# Altium PCB GPS_PCB.PcbDoc
Units mil, origin at the board's own origin, x right, y up, seen from the top; angles counter-clockwise.
Board outline 2795 x 1855 mil, 2 copper layers (Top Layer, Bottom Layer); 2 components, 6 nets, 31 pads, 0 vias.
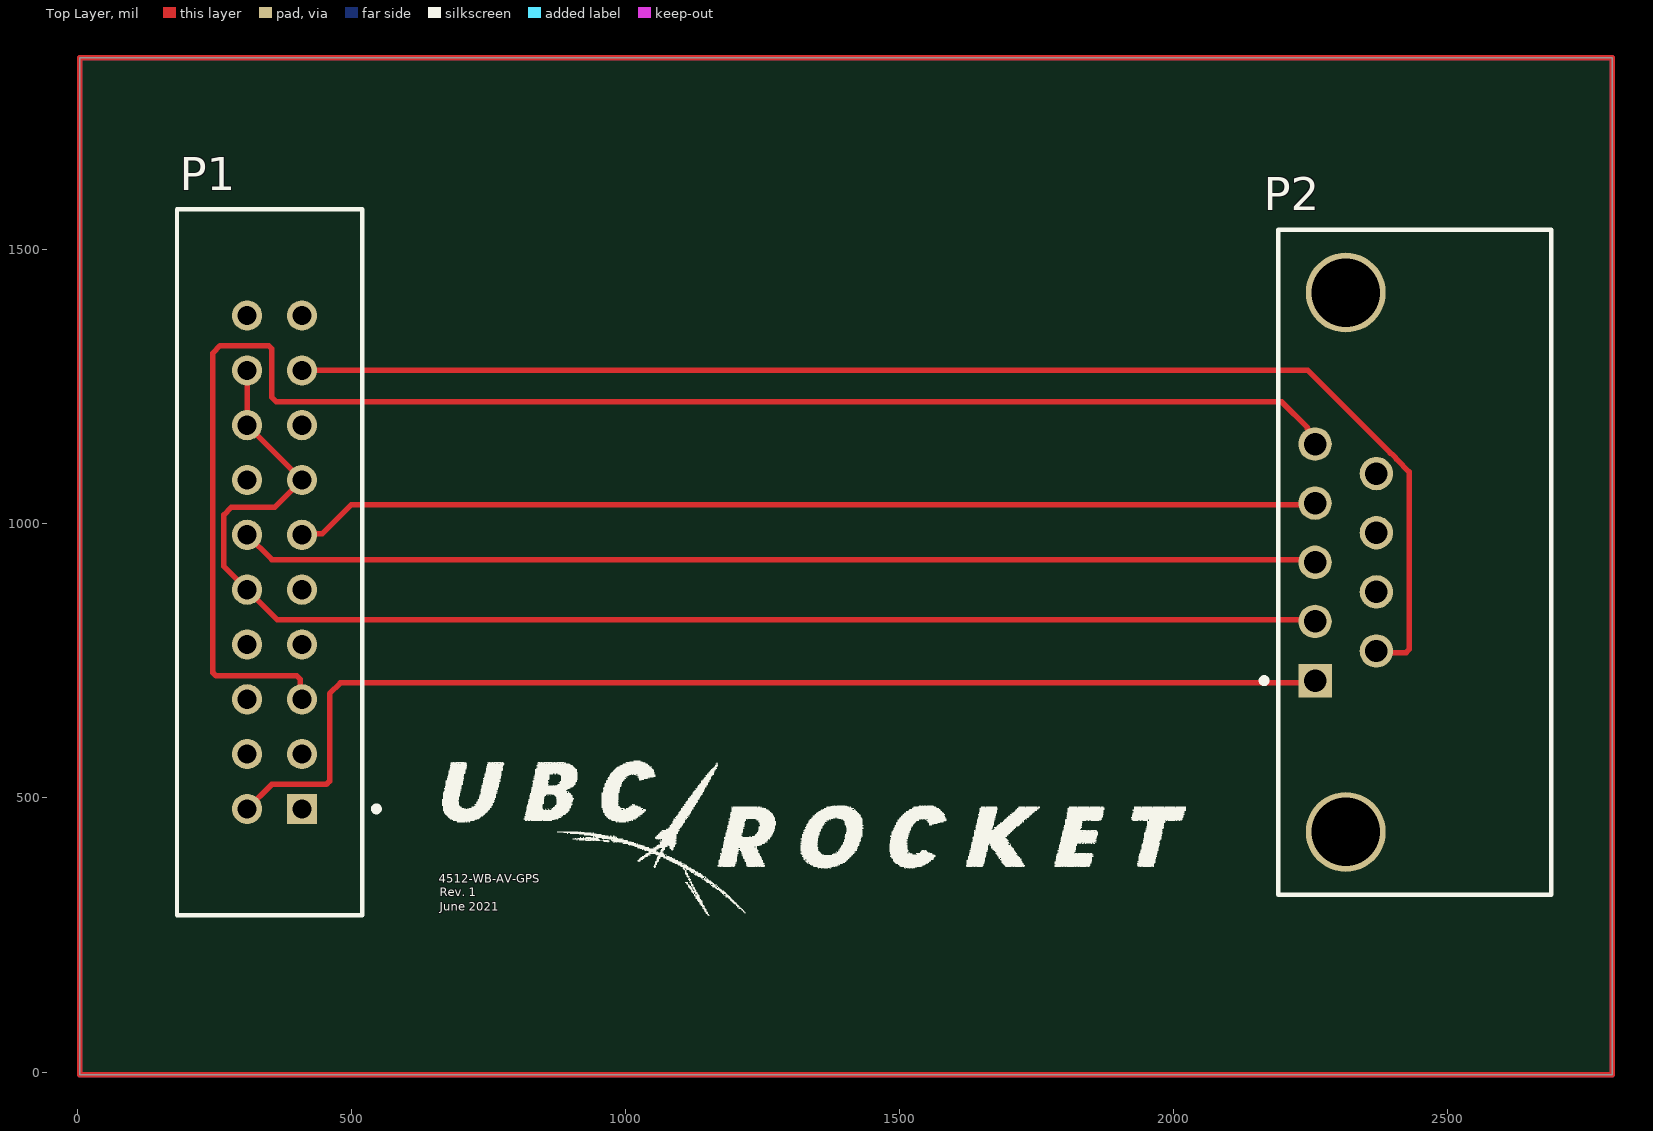
[diagram p0: Top Layer view]
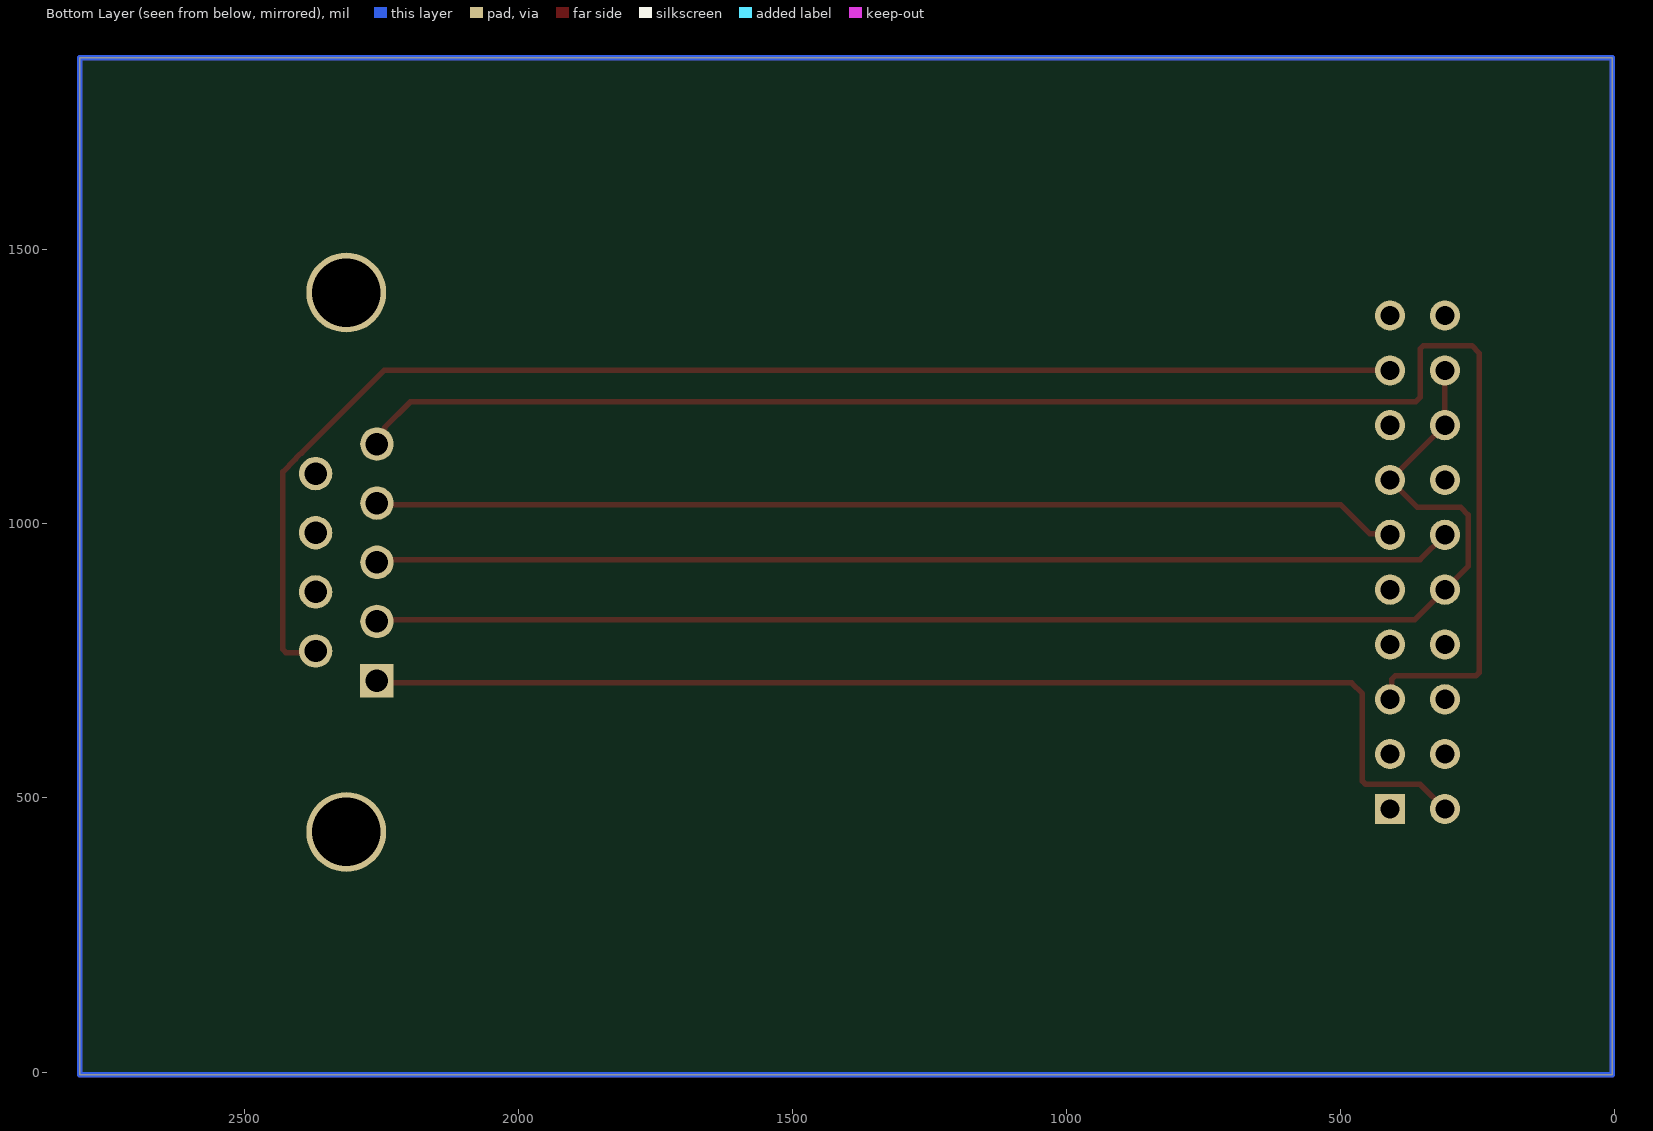
[diagram p1: Bottom Layer view, seen from below]

## Layer stack, top to bottom
Top Solder: solder mask 0.4, Solder Resist, Dk 3.5
Top Layer: signal copper 1.4
Dielectric 1: dielectric 12.6, FR-4, Dk 4.8
Bottom Layer: signal copper 1.4
Bottom Solder: solder mask 0.4, Solder Resist, Dk 3.5

## Board outline
5,-5 5,1850 2800,1850 2800,-5

## Design rules (kind name [scope] priority, off if disabled: settings)
Clearance [All] p1: gap=10 ignorepadtopadclearanceinfootprint=FALSE except(0: Arc-Hole Track-Hole SMDPad-Hole THPad-Hole Via-Hole Fill-Hole Poly-Hole Region-Hole Text-Hole)
PolygonConnect [All] p1: connectstyle=Relief reliefconductorwidth=10 reliefentries=4 polygonreliefangle="90 Angle" airgapwidth=10
RoomDefinition "20 Pin Header" [InComponentClass('20 Pin Header')] p1: confinementstyle=ConfineIn formatcopy=TRUE lockcomponents=FALSE outline 100,100 2750,100 2750,1750 100,1750
RoutingVias [All] p1: holewidth=28 width=50 viastyle="Through Hole" minholewidth=28 minwidth=50 maxholewidth=28 maxwidth=50
SolderMaskExpansion [All] p1: expansion=4 istentingtop=FALSE
Width [All] p1: maxlimit=10 minlimit=10 preferedwidth=10
30 further rules are at their usual default settings.

## Components (designator, comment, footprint, x,y, rotation, side; value= is the part's Value field where it differs from the comment)
P1 "N2520-6002RB" 3M-N2520-6002RB_V 360,930 r90 top
P2 "5747840-4" TECO-5747840-4_V 2314.09,929.92 r90 top

## Footprints (in the part's own frame and the unit in brackets; to place one, negate y for a bottom-side part, rotate by r counter-clockwise, add the part's x,y. Pads: shape width x height; smd on the part's side, far side on the other; paste and mask are expansions set on the pad)
3M-N2520-6002RB_V [mm] "CONN, 20-Leads, Body 32.72x8.59mm, Picth 2.54mm"
  rect 1.4x1.4 hole 0.89: 1(-11.43,-1.27)
  round 1.4 hole 0.89: 2(-11.43,1.27) 3(-8.89,-1.27) 4(-8.89,1.27) 5(-6.35,-1.27) 6(-6.35,1.27) 7(-3.81,-1.27) 8(-3.81,1.27) 9(-1.27,-1.27) 10(-1.27,1.27) 11(1.27,-1.27) 12(1.27,1.27) 13(3.81,-1.27) 14(3.81,1.27) 15(6.35,-1.27) 16(6.35,1.27) 17(8.89,-1.27) 18(8.89,1.27) 19(11.43,-1.27) 20(11.43,1.27)
  silkscreen extent -16.36,-4.85 16.36,4.52, body extent -16.36,-4.07 16.36,4.52, height 9.91
TECO-5747840-4_V [mm] "THD, 9-Leads, Body 30.81x18.62mm, Pitch 1.37mm"
  rect 1.55x1.55 hole 1.04: 1(-5.48,1.42)
  round 1.55 hole 1.04: 2(-2.74,1.42) 3(0,1.42) 4(2.74,1.42) 5(5.48,1.42) 6(-4.11,-1.42) 7(-1.37,-1.42) 8(1.37,-1.42) 9(4.11,-1.42)
  round 3.7 hole 3.17: MH1(-12.495,0) MH2(12.495,0)
  silkscreen extent -15.41,-9.52 15.41,3.9, body extent -15.52,-15.42 15.52,3.19, height 12.27

## Part data
P1: library part CMP-2000-06796-2, "Male Header, Pitch 2.54 mm, 2 x 10 Position, Height 9.91 mm, Tail Length 2.84 mm, -55 to 105 degC, RoHS", Manufacturer=3MInterconnectSolutions, Package Description="Male Header, Pitch 2.54 mm, 2 x 10 Position, Height 9.91 mm, Tail Length 2.84 mm", Category=ConnectorHeadersandPCBReceptacles, Contact Plating=GoldOverNickel, Datasheet URL=https://datasheet.ciiva.com/11750/0900766b807b18da-11750722.pdf, Datasheet Version=05/2007, Gender=HDR, Manufacturer URL=http://www.3m.com/, Mounting Technology=ThroughHole, Number of Contacts=20, Number of Rows=2, Package Reference=N2520-6002RB, Pitch=2.54mm, Termination Method=Solder, Type=ShroudedHeader
P2: library part CMP-2000-05648-1, "Male D-Sub Connector, Pitch 1.37 mm, 9 Position, Height 12.93 mm, Tail Length 3.55 mm, -55 to 105 degC, RoHS, Tray", Color=Black, Current Rating=6A, Manufacturer="TE Connectivity", Operating Temperature=-55°C~105°C, Package Description="9-Pin Through Hole Device, Body 30.81 x 18.62 mm, Pitch 1.37 mm", Standard Package=130, Voltage Rating=125V, 3D Model=5747840-4.pdf, Catalog Drawings=AMPD-SubMale.318, Category=Connectors,Interconnects, Connector Style=D-Sub, Connector Type=Plug,MalePins, Contact Finish=Gold, Contact Finish Thickness=Flash, Contact Type=Signal, Datasheet URL=http://www.te.com/commerce/DocumentDelivery/DDEController?Action=showdoc&DocId=Customer+Drawing%7F5747840%7FD%7Fpdf%7FEnglish%7FENG_CD_5747840_D.pdf%7F5747840-4, Datasheet Version="Rev. D, 01/2013", Dynamic Catalog=AMPLIMITEHD-20Series, Family=D-SubConnectors, Featured Product=AMPLIMITED-SubminiatureConnectors, Features=BoardLock,GroundStrap,GroundingIndents, Flange Feature=Housing/Shell(4-40), Manufacturer URL=http://www.te.com/, Mating Products="5-747905-7-ND / -CONND-SUBRCPT9POSVERTSLD / 5-787355-1-ND / -CONNRCPT9POSVERTSOLDERCUP / 5746861-4-ND / -CONNRECEPT9POSGOLDIDC / A32510-ND / -CONND-SUBRCPT9POSSLDCUPAU / AFL09B-ND / -CONND-SUBRECEPT9POS30GOLD / A31975-ND / -CONND-SUBRECEPT9P22-26AWGAU / A31974-ND / -CONND-SUBRECEPT9P20-22AWGAU / A31973-ND / -CONND-SUBRECEPT9P26-30AWGAU / A31931-ND / -CONND-SUBRCPT9POS22-26AWGAU", Mounting Technology=ThroughHole, Mounting Type=ThroughHole,RightAngle, Number of Positions=9, Number of Rows=2, Other Names=A32092, Package Reference=5747840-4, Product Training Modules=AMPLIMITED-SubConnectors, RoHS Information=5747840-4StatementofCompliance, Series=AMPLIMITEHD-20, Shell Material, Finish=Steel,TinPlated, Shell Size, Connector Layout=1(DE,E), Termination=Solder

## Nets (pads, with @x,y where several pads share a name; then routed paths per layer and width w, separated by ;. In a path a pad name is that pad's centre, name@x,y a point inside that pad or via, vN(x,y) a via of type N, cw(c..) or ccw(c..) an arc to the next point about the centre after c; other vN are vias at no path point)
3.3V_GPS: P1.2 P2.1 | length 2138.7
  Top Layer w10: P1.2 355,525 454.56,525 460.42,530.86 460.42,690.42 480,710 2254.02,710 P2.1
GND: P1.10 P1.13 P1.16 P1.18 P2.2 | length 2536.7
  Top Layer w10: P1.18 P1.16 P1.13 360,1030 280.86,1030 267.44,1016.58 267.44,922.56 P1.10 365,825 2255.23,825 P2.2
GPSPV: P1.17 P2.6 | length 2484.6
  Top Layer w10: P1.17 2245,1280 2395.73,1129.27 cw(c2370,1091.73) 2407.54,1117.46 2430,1095 2430,770.86 2424.14,765 2373.11,765 P2.6
GPSRESETN: P1.5 P2.5 | length 2937
  Top Layer w10: P1.5 406.51,683.49 406.51,716.7 400.66,722.56 253.3,722.56 247.44,728.42 247.44,1311.58 260.86,1325 349.14,1325 355,1319.14 355,1230.86 363.3,1222.56 2197.44,1222.56 2244.08,1175.92 2244.08,1173.58 2258.19,1159.47 P2.5
GPSRX: P1.12 P2.3 | length 1968.9
  Top Layer w10: P1.12 355,935 2253.11,935 P2.3
GPSTX: P1.11 P2.4 | length 1872.1
  Top Layer w10: P1.11 411.7,981.7 446.7,981.7 500,1035 2255.4,1035 P2.4
pads on no net: P1.1 P1.3 P1.4 P1.6 P1.7 P1.8 P1.9 P1.14 P1.15 P1.19 P1.20 P2.7 P2.8 P2.9 P2.MH1 P2.MH2

## Other copper
Multi-Layer:
  the board outline again, w10

## Silkscreen, mask and mechanical layers (free items; w line width, h text height)
Top Overlay:
  drawing of 11 lines, arcs and shapes, not listed
  text "4512-WB-AV-GPS" at 660,345 h15.49
  text "Rev. 1" at 661.29,320.48 h15.49
  text "June 2021" at 661.29,294.66 h15.49